# Altium PCB usomiq-bone-cape.PcbDoc (part 2 of 2)
Units mm, origin at the board's own origin, x right, y up, seen from the top; angles counter-clockwise.
Board outline 86.36 x 54.61 mm, 2 copper layers (Top Layer, Bottom Layer); 65 components, 133 nets, 450 pads, 169 vias.
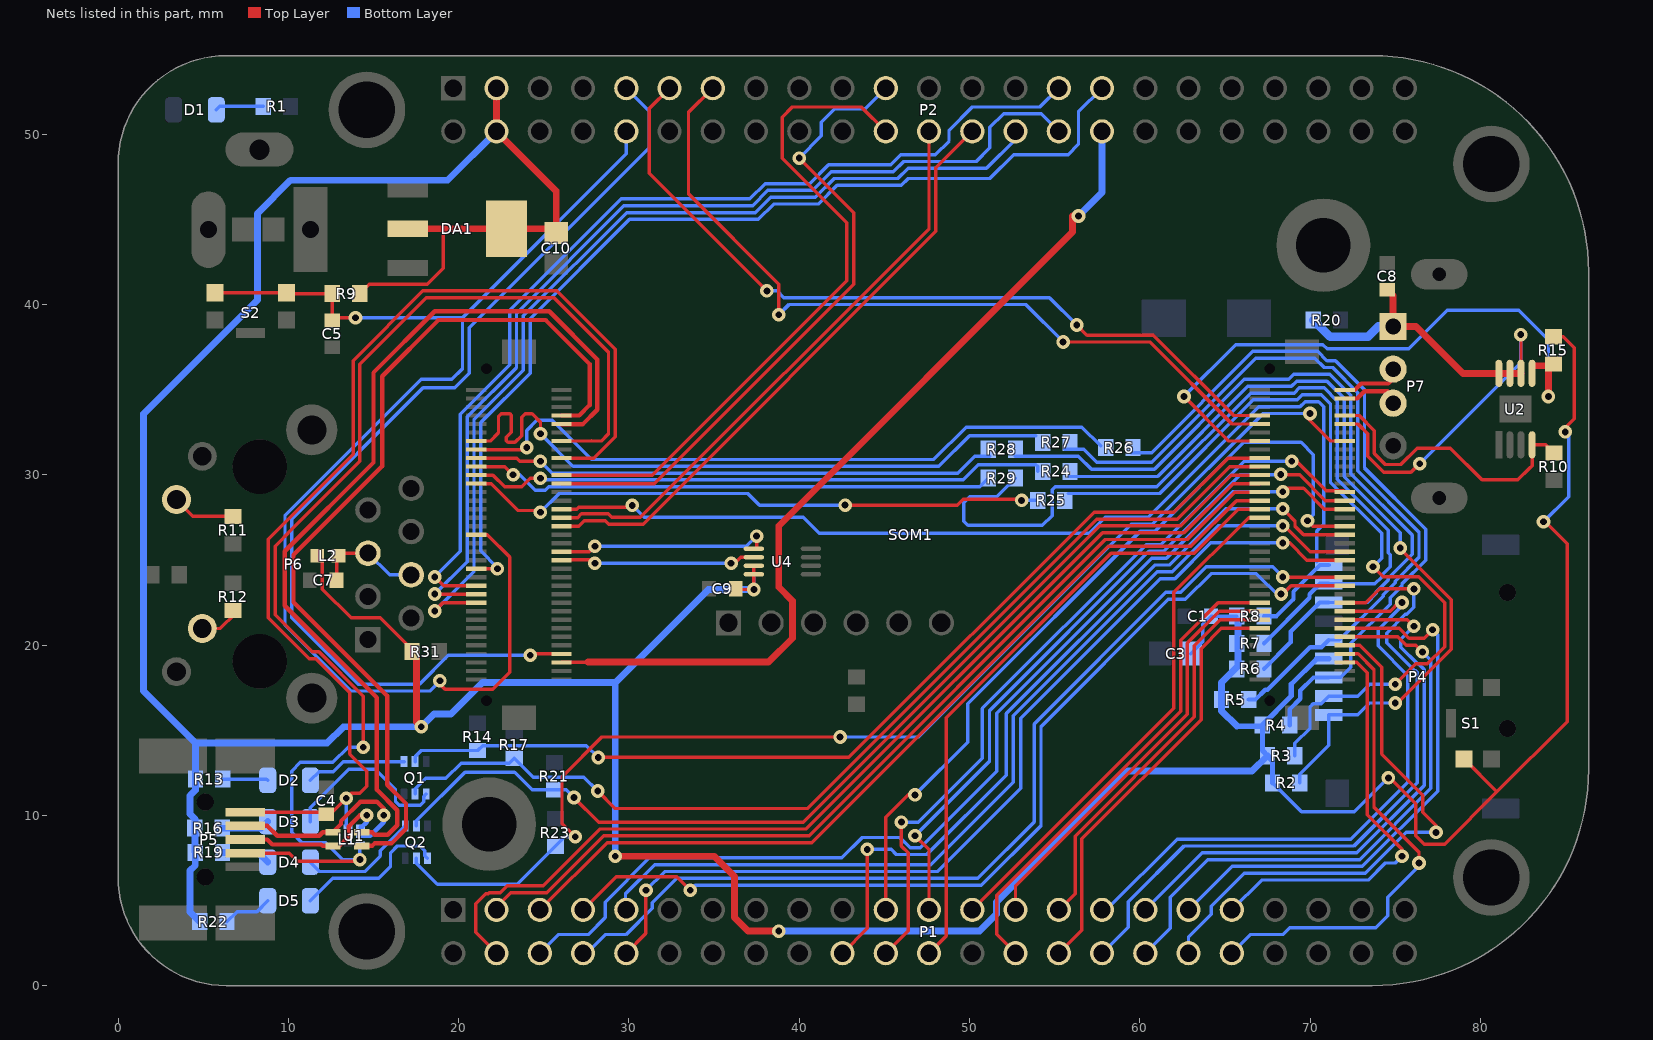
[diagram p2: the nets of this part, all layers, seen from the top]

## Via types
v1: diameter 0.8, hole 0.4, Top Layer to Bottom Layer, 166 vias
v2: diameter 0.6, hole 0.4, Top Layer to Bottom Layer, 2 vias
v3: diameter 1.27, hole 0.711, Top Layer to Bottom Layer, 1 vias

## Nets (pads, with @x,y where several pads share a name; then routed paths per layer and width w, separated by ;. In a path a pad name is that pad's centre, name@x,y a point inside that pad or via, vN(x,y) a via of type N, cw(c..) or ccw(c..) an arc to the next point about the centre after c; other vN are vias at no path point) (continued)
LCD_DATA8: P1.37 SOM1.B5 | length 24.1
  Top Layer w0.2: SOM1.B5@72.039,18.982 72.754,18.982 73.358,18.378 73.358,10.042 v1@75.4,8
  Bottom Layer w0.2: P1.37@65.405,4.445 67.16,6.2 73.41,6.2 74.41,7.2 75,7.2 v1(75.4,7.6)
LCD_DATA9: P1.38 SOM1.B7 | length 28.4
  Top Layer w0.2: SOM1.B7@72.039,19.482 72.82,19.482 73.758,18.544 73.758,10.476 76.4,7.834 v1(76.4,7.2)
  Bottom Layer w0.2: P1.38@65.405,1.905 66.5,3 68.4,3 68.8,3.4 73.85,3.4 74.555,4.105 74.555,5.18 76.2,6.825 v1@76.2,7.2
LCD_DATA10: P1.36 SOM1.B9 | length 32
  Top Layer w0.2: SOM1.B9@72.039,19.982 72.913,19.982 74.2,18.695 74.2,13.6 76.619,11.181 76.619,10.181 77.4,9.4 v1(77.4,9)
  Bottom Layer w0.2: P1.36@62.865,1.905 62.865,2.865 64.2,4.2 64.2,4.668 66.132,6.6 73.244,6.6 75.644,9 v1(77.4,9)
LCD_DATA11: P1.34 SOM1.B11 | length 35
  Top Layer w0.2: SOM1.B11@72.039,20.482 75.162,20.482 75.644,20 76.2,20 v1(76.6,19.6)
  Bottom Layer w0.2: P1.34@60.325,1.905 61.8,3.38 61.8,5.2 64,7.4 72.913,7.4 77.1,11.587 77.1,19.1 v1(76.6,19.6)
LCD_DATA12: P1.35 SOM1.B13 | length 32.7
  Top Layer w0.2: SOM1.B13@72.039,20.982 75.228,20.982 75.81,20.4 76.7,20.4 v1(77.2,20.9)
  Bottom Layer w0.2: P1.35@62.865,4.445 65.42,7 73.079,7 77.5,11.421 77.5,20.6 v1(77.2,20.9)
LCD_DATA13: P1.33 SOM1.B15 | length 33.9
  Top Layer w0.2: SOM1.B15@72.039,21.482 75.718,21.482 v1(76.1,21.1)
  Bottom Layer w0.2: P1.33@60.325,4.445 63.68,7.8 72.747,7.8 76.7,11.753 76.7,18.566 76.366,18.9 76.31,18.9 75.333,19.877 75.333,20.333 v1(76.1,21.1)
LCD_DATA14: P1.31 SOM1.B17 | length 36.5
  Top Layer w0.2: SOM1.B17@72.039,21.982 74.7,21.982 75.218,22.5 v1(75.4,22.5)
  Bottom Layer w0.2: P1.31@57.785,4.445 58.045,4.445 62.2,8.6 72.4,8.6 75.75,11.95 75.75,18.2 74,19.95 74,20.9 75.4,22.3 v1(75.4,22.5)
LCD_DATA15: P1.32 SOM1.B19 | length 40.8
  Top Layer w0.2: SOM1.B19@72.039,22.482 73.282,22.482 74.1,23.3 v1(76.1,23.3)
  Bottom Layer w0.2: P1.32@57.785,1.905 59.315,3.435 59.315,4.915 62.6,8.2 72.582,8.2 76.3,11.918 76.3,18.4 76.2,18.5 76.144,18.5 74.5,20.144 74.5,20.7 75.6,21.8 75.69,21.8 76.1,22.21 v1(76.1,23.3)
LCD_DE: P1.30 SOM1.B14 | length 25.3
  Top Layer w0.2: P1.30@55.245,1.905 56.6,3.26 56.6,8.617 63.6,15.617 63.6,19.79 64.792,20.982 SOM1.B14@67.039,20.982
LCD_HSYNC: P1.29 SOM1.B16 | length 23.3
  Top Layer w0.2: P1.29@55.245,4.445 56.2,5.4 56.2,8.783 63.2,15.783 63.2,19.956 64.726,21.482 SOM1.B16@67.039,21.482
LCD_PCLK: P1.28 SOM1.B20 | length 28.9
  Top Layer w0.2: P1.28@52.705,1.905 51.6,3.01 51.6,5.314 62.4,16.114 62.4,20.287 64.595,22.482 SOM1.B20@67.039,22.482
LCD_VSYNC: P1.27 SOM1.B18 | length 24.9
  Top Layer w0.2: P1.27@52.705,4.445 52.705,5.854 62.8,15.949 62.8,20.121 64.661,21.982 SOM1.B18@67.039,21.982
MMC0_CD: P4.9 R8.1 SOM1.A41 | length 63
  Top Layer w0.2: SOM1.A41@26.039,27.982 26.929,27.982 27.047,28.1 v1@29.864,28.1
  Bottom Layer w0.2: v1(30.2,28.2) 30.9,27.5 40.242,27.5 41.173,26.568 57.031,26.568 57.963,27.5 60.5,27.5 67,34 69.41,34 69.71,34.3 70.5,34.3 70.8,34 70.8,27.1 70.4,26.7 P4.9@70.4,24.9
  Bottom Layer w0.254: R8.1@67.3,21.7 68.028,21.7 69.027,22.699 69.027,23.139 70.588,24.7 P4.9@71.1,24.7
MMC0_CLKO: R27.2 SOM1.A58 | length 39.8
  Top Layer w0.2: SOM1.A58@21.039,31.982 21.866,31.982 22.339,32.455 22.339,33.421 22.5,33.582 23.018,33.582 23.1,33.5 23.1,32.5 22.8,32.2 22.8,32 22.9,31.9 23.31,31.9 23.7,32.29 23.7,33.382 23.9,33.582 24.31,33.582 24.807,33.085 v1(24.807,32.407)
  Bottom Layer w0.2: v1(24.807,32.407) 26.714,30.5 48.2,30.5 50,32.3 R27.2@53.9,32.3
MMC0_CMD: R26.2 SOM1.A56 | length 40.4
  Top Layer w0.2: SOM1.A56@21.039,31.482 23.882,31.482 v1(24,31.6) v1@24,31.8
  Bottom Layer w0.2: v1(24,31.6) 24,32.6 24.6,33.2 25.5,33.2 27.8,30.9 47.9,30.9 49.8,32.8 56.6,32.8 R26.2@57.7,31.7
MMC0_DAT0: R28.2 SOM1.A54 | length 30.9
  Top Layer w0.2: SOM1.A54@21.039,30.982 23.418,30.982 23.6,30.8 v1(24.8,30.8)
  Bottom Layer w0.2: v1(24.8,30.8) 25.5,30.1 49.3,30.1 50.3,31.1 R28.2@51.2,31.1
MMC0_DAT1: R29.2 SOM1.A52 | length 30.9
  Top Layer w0.2: SOM1.A52@21.039,30.482 22.718,30.482 v1(23.2,30)
  Bottom Layer w0.2: v1(23.2,30) 23.6,30 24.5,29.1 25.09,29.1 25.29,29.3 50.6,29.3 R29.2@51.1,29.8
MMC0_DAT2: R24.2 SOM1.A50 | length 34.2
  Top Layer w0.2: SOM1.A50@21.039,29.982 22.018,29.982 22.7,29.3 23.7,29.3 24.2,29.8 v1(24.8,29.8)
  Bottom Layer w0.2: v1(24.8,29.8) 24.9,29.7 49.626,29.7 50.526,30.6 53.9,30.6 54,30.5 R24.2@54,30.2
MMC0_DAT3: R25.2 SOM1.A48 | length 34.6
  Top Layer w0.2: SOM1.A48@21.039,29.482 21.918,29.482 23.5,27.9 24.7,27.9 v1(24.8,27.8) ; v1(42.697,28.219) 49.276,28.219 49.632,28.575 52.984,28.575 v1(53.061,28.499)
  Bottom Layer w0.2: v1(24.8,27.8) 25.9,28.9 36.988,28.9 37.668,28.219 v1(42.697,28.219) ; v1(53.061,28.499) 53.999,28.499 R25.2@54,28.5
MMC1_CLK: P1.21 SOM1.B37 | length 47.6
  Top Layer w0.2: P1.21@45.085,4.445 45.085,9.885 46.4,11.2 v1(46.8,11.2) ; v1(69.85,27.3) 70.168,26.982 SOM1.B37@72.039,26.982
  Bottom Layer w0.2: v1(46.8,11.2) 49.903,14.303 49.903,16.56 60.043,26.7 60.909,26.7 66.109,31.9 69.471,31.9 70.2,31.171 70.2,27.65 v1(69.85,27.3)
MMC1_CMD: P1.20 SOM1.B35 | length 46.3
  Top Layer w0.2: P1.20@42.545,1.905 44,3.36 v1(44,8) ; v1(68.4,28) 68.61,28 68.61,27.79 69.116,27.284 69.116,26.984 69.618,26.482 SOM1.B35@72.039,26.482
  Bottom Layer w0.2: v1(44,8) 45.4,8 45.7,7.7 47.5,7.7 52.151,12.351 52.151,15.98 60.872,24.7 61.737,24.7 65.037,28 v1(68.4,28)
MMC1_DAT0: P1.25 SOM1.B40 | length 30.4
  Top Layer w0.2: P1.25@50.165,4.445 62,16.28 62,23.092 66.39,27.482 SOM1.B40@67.039,27.482
MMC1_DAT1: P1.24 SOM1.B42 | length 37.7
  Top Layer w0.2: P1.24@47.625,1.905 48.635,2.915 48.635,15.725 58.31,25.4 63.2,25.4 65.782,27.982 SOM1.B42@67.039,27.982
MMC1_DAT2: P1.5 SOM1.B44 | length 52.2
  Top Layer w0.2: P1.5@24.765,4.445 28.72,8.4 40.744,8.4 58.144,25.8 63,25.8 65.682,28.482 SOM1.B44@67.039,28.482
MMC1_DAT3: P1.6 SOM1.B41 | length 62
  Top Layer w0.2: v1@68.4,29.2 68.401,29.201 69.618,29.201 70.838,27.982 SOM1.B41@72.039,27.982
  Bottom Layer w0.2: P1.6@24.765,1.905 25.86,3 27.6,3 28.6,4 28.6,4.9 31.2,7.5 42.5,7.5 43.7,8.7 45.91,8.7 46.51,8.1 47.1,8.1 51.6,12.6 51.6,15.994 60.706,25.1 61.572,25.1 65.472,29 v1(68.4,29)
MMC1_DAT4: P1.23 SOM1.B43 | length 41.1
  Top Layer w0.2: v1(46.8,8.8) 47.625,7.975 P1.23@47.625,4.445 ; v1@68.4,30 69.385,30 70.903,28.482 SOM1.B43@72.039,28.482
  Bottom Layer w0.2: v1(46.8,8.8) 51.176,13.176 51.176,16.136 60.54,25.5 61.406,25.5 65.906,30 v1@68.4,30
  other v1: 68.275,30.025
MMC1_DAT5: P1.22 SOM1.B45 | length 45.5
  Top Layer w0.2: P1.22@45.085,1.905 46.4,3.22 46.4,7.8 46,8.2 v1(46,9.6) ; v1@69.261,30.861 69.261,30.752 70.955,29.057 71.964,29.057 SOM1.B45@72.039,28.982
  Bottom Layer w0.2: v1(46,9.6) 47,9.6 50.751,13.351 50.751,16.277 60.375,25.9 61.24,25.9 66.14,30.8 v1@69,30.8
  other v1: 68.925,30.8
MMC1_DAT6: P1.3 SOM1.B46 | length 55.2
  Top Layer w0.2: P1.3@22,4.4 23.055,5.455 25.175,5.455 28.52,8.8 40.579,8.8 57.979,26.2 62.8,26.2 65.582,28.982 SOM1.B46@67.039,28.982
MMC1_DAT7: P1.4 SOM1.B48 | length 59.7
  Top Layer w0.2: P1.4@22.225,1.905 21,3.13 21,4.8 21.6,5.4 21.752,5.4 21.807,5.455 22.455,5.455 22.855,5.855 24.975,5.855 28.32,9.2 40.413,9.2 57.813,26.6 62.6,26.6 65.482,29.482 SOM1.B48@67.039,29.482
NetC7_1: C7.1 L2.2 P6.4 P6.5 | length 6.4
  Top Layer w0.2: C7.1@12.831,23.805 12.831,25.142 13.084,25.395 P6.5@14.675,25.395
  Bottom Layer w0.2: P6.5@14.675,25.395 15.945,24.125 P6.4@17.215,24.125
NetD1_1: D1.1 R1.1 | length 2.8
  Bottom Layer w0.2: D1.1@5.766,51.435 5.969,51.638 R1.1@8.522,51.638
NetD2_1: D2.1 R13.1 | length 2.7
  Bottom Layer w0.2: R13.1@6.144,12.13 8.716,12.13 D2.1@8.789,12.057
NetD2_2: D2.2 Q1.1 | length 6
  Bottom Layer w0.2: D2.2@11.289,12.057 11.802,12.57 12.643,12.57 13.228,13.155 Q1.1@16.794,13.155
NetD3_1: D3.1 R16.1 | length 2.8
  Bottom Layer w0.4: R16.1@6.109,9.246 8.403,9.246 D3.1@8.789,9.632
NetD3_2: D3.2 Q1.4 | length 10.3
  Bottom Layer w0.2: D3.2@11.289,9.632 11.289,10.455 13.534,12.7 15.09,12.7 16.294,11.496 16.294,10.806 16.5,10.6 17.738,10.6 17.944,10.806 17.944,11.105 Q1.4@18.094,11.255
NetD4_1: D4.1 R19.1 | length 2.9
  Bottom Layer w0.4: R19.1@6.134,7.823 8.223,7.823 D4.1@8.789,7.257
NetD4_2: D4.2 Q2.1 | length 7.1
  Bottom Layer w0.2: D4.2@11.289,7.257 11.846,6.7 14.49,6.7 15.4,7.61 15.4,7.911 Q2.1@16.869,9.38
NetD5_1: D5.1 R22.1 | length 2.9
  Bottom Layer w0.2: R22.1@6.394,3.755 6.989,4.35 8.157,4.35 D5.1@8.789,4.982
NetD5_2: D5.2 Q2.4 | length 9.2
  Bottom Layer w0.2: D5.2@11.289,4.982 12.607,6.3 15.3,6.3 16,7 16,7.8 16.4,8.2 17.748,8.2 18.019,7.929 18.019,7.63 Q2.4@18.169,7.48
NetP6_10: P6.10 R12.2 | length 2.3
  Top Layer w0.2: P6.10@4.945,20.975 6,20.975 R12.2@6.875,21.85
NetP6_11: P6.11 R11.2 | length 3.7
  Top Layer w0.2: P6.11@3.425,28.545 4.395,27.575 R11.2@6.756,27.575
PWR_BUT: P2.9 SOM1.A7 | length 59.7
  Top Layer w0.2: v1(24.2,19.4) 24.282,19.482 SOM1.A7@26.039,19.482
  Bottom Layer w0.2: v1(24.2,19.4) 19.4,19.4 17.7,17.7 14.1,17.7 10.2,21.6 10.2,27.4 17.906,35.106 19.78,35.106 20.626,35.952 20.626,38.627 31.2,49.2 31.2,51.36 ; P2.9@29.845,52.705 31.19,51.36
SD_CLK: P4.5 R5.1 R27.1 | length 45.6
  Bottom Layer w0.2: R27.1@55.6,31.5 56.7,31.5 57.467,30.733 60.699,30.733 66.81,36.845 70.284,36.845 70.828,36.3 71.328,36.3 72.8,34.828 72.8,30.228 76.4,26.628 76.4,25.156 75,23.756 75,23.655 74.944,23.6 74.3,22.956 74.3,22.868 71.731,20.3 P4.5@71.1,20.3
  Bottom Layer w0.254: R5.1@66.4,16.8 66.803,16.8 67.374,17.372 67.5,17.372 70.005,19.877 70.677,19.877 P4.5@71.1,20.3
SD_CMD: P4.3 R4.1 R26.1 | length 42.5
  Bottom Layer w0.2: R26.1@59.5,31.3 60.7,31.3 66.644,37.245 70.45,37.245 70.994,36.7 71.494,36.7 73.2,34.994 73.2,30.4 76.8,26.8 76.8,24.99 75.4,23.59 75.4,23.49 75.11,23.2 74.7,22.79 74.7,22.4 72.4,20.1 72.4,18.7 71.8,18.1 P4.3@71.1,18.1
  Bottom Layer w0.254: R4.1@68.8,15.3 68.8,16.222 69.427,16.849 69.427,17.327 70.2,18.1 P4.3@71.1,18.1
SD_D0: P4.7 R6.1 R28.1 | length 45.6
  Bottom Layer w0.2: R28.1@52.7,31.1 56.4,31.1 57.167,30.333 60.865,30.333 66.131,35.6 68.747,35.6 69.047,35.9 71.163,35.9 72.4,34.663 72.4,30.063 76,26.463 76,25.321 74.6,23.921 74.6,23.821 73.9,23.121 73.9,23.034 73.366,22.5 P4.7@71.1,22.5
  Bottom Layer w0.254: R6.1@67.3,18.6 68.873,20.173 68.873,20.801 70.572,22.5 P4.7@71.1,22.5
SD_D1: P4.8 R7.1 R29.1 | length 51.8
  Bottom Layer w0.2: R29.1@52.7,29.8 51.602,28.702 50.013,28.702 49.657,28.346 49.657,27.28 49.911,27.026 54.28,27.026 54.85,27.596 54.85,29.124 55.026,29.3 61.01,29.3 66.51,34.8 69.079,34.8 69.379,35.1 70.831,35.1 71.6,34.331 71.6,29.731 74.6,26.731 74.6,25.41 74.7,25.31 74.7,24.587 74.2,24.087 74.2,23.987 73.813,23.6 P4.8@71.1,23.6
  Bottom Layer w0.254: R7.1@67.3,20.1 69.973,22.773 69.973,22.985 70.588,23.6 P4.8@71.1,23.6
SD_D2: P4.1 R2.1 R24.1 | length 49.8
  Top Layer w0.2: v1(75,16.6) 75.156,16.6 78.3,19.744 78.3,22.656 75.3,25.655 v1(75.3,25.7)
  Bottom Layer w0.2: R24.1@55.8,29.9 61.044,29.9 66.344,35.2 68.913,35.2 69.213,35.5 70.997,35.5 72,34.497 72,29.897 75.3,26.597 v1(75.3,25.7) ; R2.1@69.4,11.9 69.4,12.426 71.1,14.126 P4.1@71.1,15.9 72.8,15.9 73.5,16.6 v1(75,16.6)
SD_D3: P4.2 R3.1 R25.1 | length 49.3
  Top Layer w0.2: v1(73.7,24.6) 74.3,24 76.39,24 77.9,22.49 77.9,19.91 76.89,18.9 76.2,18.9 v1(75,17.7)
  Bottom Layer w0.2: R25.1@55.8,28.9 61.175,28.9 66.675,34.4 69.244,34.4 69.544,34.7 70.666,34.7 71.2,34.166 71.2,29.566 74.2,26.566 74.2,25.1 v1(73.7,24.6) ; R3.1@69.1,13.5 69.1,14.226 70,15.126 70,16.374 70.176,16.55 70.65,16.55 P4.2@71.1,17 72.8,17 73.5,17.7 v1(75,17.7)
SPI1_CS0: P2.28 SOM1.A20 | length 55.3
  Top Layer w0.2: v1(18.6,22) 19.082,22.482 SOM1.A20@21.039,22.482
  Bottom Layer w0.2: v1(18.6,22) 20.9,24.3 20.9,33.235 23.8,36.135 23.8,39.331 29.869,45.4 37.43,45.4 38.33,46.3 40.953,46.3 42.053,47.4 45.8,47.4 46.4,48 51,48 P2.28@52.705,49.705
SPI1_D0: P2.29 SOM1.A24 | length 58.2
  Top Layer w0.2: v1(18.6,24) 19.118,23.482 SOM1.A24@21.039,23.482
  Bottom Layer w0.2: v1(18.6,24) 20.1,25.5 20.1,33.566 23,36.466 23,39.663 29.537,46.2 37.099,46.2 37.999,47.1 40.621,47.1 41.721,48.2 45.366,48.2 45.966,48.8 48,48.8 48.8,49.6 48.8,50.228 50.172,51.6 54.14,51.6 P2.29@55.245,52.705
SPI1_D1: P2.30 SOM1.A22 | length 58.8
  Top Layer w0.2: v1(18.6,23) 18.618,22.982 SOM1.A22@21.039,22.982
  Bottom Layer w0.2: v1(18.6,23) 20.5,24.9 20.5,33.4 23.4,36.3 23.4,39.497 29.703,45.8 37.264,45.8 38.164,46.7 40.787,46.7 41.887,47.8 45.531,47.8 46.131,48.4 50.4,48.4 51.2,49.2 51.2,50.4 52,51.2 54.21,51.2 P2.30@55.245,50.165
SPI1_SCLK: P2.31 SOM1.A28 | length 57.8
  Top Layer w0.2: SOM1.A28@21.039,24.482 21.043,24.486 v1(22.276,24.486)
  Bottom Layer w0.2: v1(22.276,24.486) 22.276,24.551 21.3,25.527 21.3,33.069 24.2,35.969 24.2,39.166 30.034,45 37.596,45 38.496,45.9 41.118,45.9 42.218,47 46,47 46.4,47.4 51.2,47.4 52.6,48.8 55.8,48.8 56.4,49.4 56.4,51.32 P2.31@57.785,52.705
SYS_RESETN: C5.1 P2.10 R9.1 S2.2 S2.4 SOM1.A36 | length 79.6
  Top Layer w0.2: S2.4@5.681,40.691 S2.2@9.881,40.691 9.931,40.64 R9.1@12.586,40.64 12.573,40.627 C5.1@12.573,39.065 12.725,39.218 v1(13.945,39.218) ; v1(18.9,17.9) 18.9,17.7 19.2,17.4 22,17.4 23,18.4 23,25.17 21.688,26.482 SOM1.A36@21.039,26.482
  Bottom Layer w0.2: v1(13.945,39.218) 13.954,39.227 20.227,39.227 ; v1(18.9,17.9) 18.3,17.3 13.7,17.3 9.8,21.2 9.8,27.6 17.8,35.6 19.59,35.6 20.227,36.237 20.227,39.227 ; P2.10@29.845,50.165 29.845,48.845 20.227,39.227
TIMER4: P1.7 SOM1.B23 | length 58.6
  Top Layer w0.2: P1.7@27.305,4.445 29.26,6.4 32.8,6.4 v1(33.6,5.6) ; v1@68.239,22.839 68.882,23.482 SOM1.B23@72.039,23.482
  Bottom Layer w0.2: v1(33.6,5.6) 33.9,5.9 50.7,5.9 54.2,9.4 54.2,15.2 61.682,22.682 62.682,22.682 64.2,24.2 66.839,24.2 68.239,22.8 68.3,22.861 68.3,23.293 v1(68.3,23)
TIMER5: P1.9 SOM1.B31 | length 55.1
  Top Layer w0.2: v1@68.575,26.925 70.018,25.482 SOM1.B31@72.039,25.482
  Bottom Layer w0.2: P1.9@29.8,4.2 29.8,5.39 31.51,7.1 47.734,7.1 52.576,11.941 52.576,15.838 61.037,24.3 61.903,24.3 64.603,27 v1(68.4,27)
TIMER6: P1.10 SOM1.B29 | length 56.5
  Top Layer w0.2: P1.10@29.845,1.905 31,3.06 v1(31,5.6) ; v1(68.4,26) 68.8,26 69.818,24.982 SOM1.B29@72.039,24.982
  Bottom Layer w0.2: v1(31,5.6) 32.1,6.7 48.1,6.7 53,11.6 53,15.697 61.203,23.9 62.069,23.9 64.169,26 v1(68.4,26)
TIMER7: P1.8 SOM1.B25 | length 57.6
  Top Layer w0.2: v1(68.4,24) 68.418,23.982 SOM1.B25@72.039,23.982
  Bottom Layer w0.2: P1.8@27.6,2 28.6,3 29.828,3 31.375,4.547 31.375,4.863 32.812,6.3 50.49,6.3 53.8,9.61 53.8,15.366 61.534,23.1 62.4,23.1 63.9,24.6 67.8,24.6 v1(68.4,24)
UART0_RX: SOM1.A29 U4.6 | length 11.4
  Top Layer w0.2: SOM1.A29@26.2,25 27.8,25 v1(28,24.8) ; v1(36,24.8) 36.2,24.8 36.557,25.157 U4.6@37.339,25.157
  Bottom Layer w0.2: v1(28,24.8) v1(36,24.8)
UART0_TX: SOM1.A31 U4.5 | length 12.5
  Top Layer w0.2: SOM1.A31@26.039,25.482 27.682,25.482 v1(28,25.8) ; U4.5@37.5,25.7 v1(37.5,26.4)
  Bottom Layer w0.2: v1(28,25.8) 36.9,25.8 v1(37.5,26.4)
UART1_RXD: P2.26 SOM1.A37 | length 36.1
  Top Layer w0.2: SOM1.A37@26.039,26.982 27.061,26.982 27.379,27.3 28.621,27.3 28.821,27.1 30.831,27.1 48.025,44.294 48.025,48.025 P2.26@50.165,50.165
UART1_TXD: P2.24 SOM1.A39 | length 34.5
  Top Layer w0.2: SOM1.A39@26.039,27.482 26.995,27.482 27.213,27.7 28.787,27.7 28.987,27.5 30.666,27.5 47.625,44.459 P2.24@47.625,50.165
UART2_RXD: P2.22 SOM1.A49 | length 39.6
  Top Layer w0.2: SOM1.A49@26.039,29.982 31.382,29.982 42.8,41.4 42.8,44.8 39,48.6 39,49.742 38.995,49.747 38.995,50.995 39.6,51.6 43.65,51.6 P2.22@45.085,50.165
UART2_TXD: P2.21 SOM1.A47 | length 37.6
  Top Layer w0.2: SOM1.A47@26.039,29.482 31.482,29.482 43.2,41.2 43.2,45.4 40.3,48.3
  Bottom Layer w0.2: v1(40,48.6) 41.3,49.9 41.3,50.7 42.1,51.5 43.88,51.5 P2.21@45.085,52.705
UART4_RXD: P2.11 SOM1.B64 | length 47
  Top Layer w0.2: P2.11@32.385,52.705 31.191,51.511 31.191,47.709 v1@37.95,40.95 ; v1(56.3,38.8) 56.9,38.2 60.8,38.2 65.518,33.482 SOM1.B64@67.039,33.482
  Bottom Layer w0.2: v1(38.1,40.8) 38.7,40.8 39.1,40.4 54.7,40.4 v1(56.3,38.8)
UART4_TXD: P2.13 SOM1.B62 | length 47.5
  Top Layer w0.2: P2.13@34.925,52.705 33.5,51.28 33.5,46.5 38.8,41.2 v1(38.8,39.4) ; v1(55.5,37.8) 60.6,37.8 65.418,32.982 SOM1.B62@67.039,32.982
  Bottom Layer w0.2: v1(38.8,39.4) 39.4,40 53.3,40 v1(55.5,37.8)
USB0_D_N: L1.4 P5.2 U1.2 | length 12
  Top Layer w0.254: P5.2@7.469,9.381 8.763,9.381 9.344,8.8 11.815,8.8 12.02,9.005 L1.4@12.619,9.005 12.619,9.019 13.088,9.488 13.088,9.66 14.228,10.8 15.2,10.8 15.6,10.4 v1(15.6,10)
  Bottom Layer w0.254: U1.2@14.239,8.807 14.807,8.807 15.6,9.6 v1(15.6,10)
USB0_D_P: L1.1 P5.3 U1.1 | length 9.3
  Top Layer w0.254: P5.3@7.469,8.581 8.763,8.581 9.052,8.292 11.933,8.292 12.02,8.205 L1.1@12.619,8.205 13.005,8.205 13.542,8.742 13.542,9.34 14.202,10 v1(14.6,10)
  Bottom Layer w0.254: U1.1@14.239,9.307 14.307,9.307 14.6,9.6 v1(14.6,10)
USB0_ID: P5.4 SOM1.A57 U1.3 | length 73.5
  Top Layer w0.2: P5.4@7.469,7.781 10.05,7.781 10.516,7.315 14.115,7.315 v1(14.2,7.4) ; 9.807,26.393 10.207,26.792 ; v1(14.4,14) 14.4,17 11.8,19.6 11.4,19.6 9.225,21.775 9.225,25.81 10.207,26.792 ; SOM1.A57@26.039,31.982 27.782,31.982 ; 27.8,32 27.782,31.982 ; 10.207,26.792 14.2,30.785 14.2,36.5 18.1,40.4 25.6,40.4 28.8,37.2 28.8,32.41 28.372,31.982 27.782,31.982
  Bottom Layer w0.2: v1(14.2,7.4) 13.2,7.4 12.2,8.4 10.8,8.4 10.2,9 10.2,12.6 10.707,13.107 12.614,13.107 13.507,14 v1(14.4,14) ; v1@14.2,7.6 14.2,8.268 U1.3@14.239,8.307
USB0_N: L1.3 SOM1.A61 | length 55.1
  Top Layer w0.254: L1.3@14.319,9.005 14.918,9.005 15.063,8.86 15.842,8.86 16.4,9.418 16.4,10.3 15.2,11.5 15.2,16.9 9.792,22.308 9.792,25.51 15,30.718 15,36 18.6,39.6 25.318,39.6 28.146,36.772 28.146,33.822 27.298,32.974 SOM1.A61@26.039,32.974
USB0_P: L1.2 SOM1.A63 | length 53.4
  Top Layer w0.254: L1.2@14.319,8.205 14.918,8.205 15.065,8.352 16.052,8.352 16.908,9.208 16.908,10.692 15.8,11.8 15.8,17.018 10.3,22.518 10.3,25.3 15.508,30.508 15.508,35.79 18.81,39.092 25.108,39.092 27.692,36.508 27.692,34.092 27.082,33.482 SOM1.A63@26.039,33.482
USB0_VBUS: C4.1 P5.1 SOM1.A53 U1.6 | length 66.6
  Top Layer w0.2: P5.1@7.469,10.181 12.106,10.181 C4.1@12.219,10.068 12.468,10.068 v1(13.4,11) 13.7,11.3 14.2,11.3 14.6,11.7 14.6,12.6 13.6,13.6 13.6,17.206 11.606,19.2 11.234,19.2 8.825,21.609 8.825,26.225 9.561,26.961 13.8,31.2 13.8,36.7 17.9,40.8 25.766,40.8 29.2,37.366 29.2,32.244 27.938,30.982 SOM1.A53@26.039,30.982
  Bottom Layer w0.2: v1(13.4,11) 13.4,9.406 U1.6@13.499,9.307
USB1_DRVVBUS: R10.2 SOM1.B63 U2.4 | length 17.2
  Top Layer w0.2: SOM1.B63@72.039,33.482 72.884,33.482 73.779,32.587 73.779,31.249 74.423,30.605 75.335,30.605 76.29,31.56 78.24,31.56 80.1,29.7 82.207,29.7 82.889,30.382 82.889,30.389 83.039,30.539 U2.4@83.039,31.757 83.839,31.757 R10.2@84.314,31.282
USB1_N: P7.2 SOM1.B69 | length 3.7
  Top Layer w0.254: SOM1.B69@72.039,34.982 72.629,34.982 73.004,35.357 74.6,35.357 74.879,35.636 P7.2@74.879,36.205
USB1_OCN: R15.1 SOM1.B58 U2.5 | length 35.9
  Top Layer w0.2: v1(62.6,34.6) 65.218,31.982 SOM1.B58@67.039,31.982
  Top Layer w0.4: U2.5@83.1,36.4 R15.1@84.289,36.4 ; v1(84,34.6) 84,36.018
  Bottom Layer w0.2: v1(62.6,34.6) 65.644,37.644 70.755,37.644 71,37.4 75.8,37.4 78.07,39.67 82.25,39.67 84,37.92 v1(84,34.6)
USB1_P: P7.3 SOM1.B67 | length 3.5
  Top Layer w0.254: SOM1.B67@72.039,34.482 72.771,34.482 73.192,34.903 74.546,34.903 74.879,34.57 P7.3@74.879,34.205
USB1_VBUS: C8.2 P7.1 R20.1 SOM1.B61 U2.6 U2.7 U2.8 | length 35.2
  Top Layer w0.2: SOM1.B61@72.039,32.982 72.818,32.982 73.379,32.421 73.379,31.084 74.323,30.14 75.93,30.14 v1(76.44,30.65) ; v1(82.38,38.23) 82.389,38.221 U2.6@82.389,35.957
  Top Layer w0.4: C8.2@74.539,40.87 74.879,40.53 P7.1@74.879,38.705 76.23,38.705 78.978,35.957 U2.8@81.089,35.957 U2.7@81.739,35.957 U2.6@82.389,35.957
  Bottom Layer w0.2: v1(76.44,30.65) 82.38,36.59 v1(82.38,38.23)
  Bottom Layer w0.508: R20.1@70.189,39.082 70.197,39.082 71.179,38.1 73.4,38.1 74.005,38.705 P7.1@74.879,38.705
USR0: Q2.5 R23.2 SOM1.B57 | length 70.6
  Top Layer w0.2: v1(26.848,8.738) 26.072,9.514 26.072,12.262 28.41,14.6 v1(42.4,14.6) ; v1@69.9,33.3 71.218,31.982 SOM1.B57@72.039,31.982
  Bottom Layer w0.2: Q2.5@17.519,7.48 17.519,7.181 18.756,5.944 23.431,5.944 R23.2@25.679,8.192 26.225,8.738 v1(26.848,8.738) ; v1(42.4,14.6) 47,14.6 59.5,27.1 60.743,27.1 67.243,33.6 v1(70,33.6)
USR1: Q2.2 R21.2 SOM1.B50 | length 60.7
  Top Layer w0.2: v1(26.772,11.049) 28.221,9.6 40.247,9.6 57.647,27 62.4,27 65.382,29.982 SOM1.B50@67.039,29.982
  Bottom Layer w0.2: Q2.2@17.519,9.38 17.519,9.679 20.372,12.532 23.282,12.532 24.32,11.494 R21.2@25.629,11.494 26.327,11.494 v1(26.772,11.049)
USR2: Q1.5 R17.2 SOM1.B52 | length 60.2
  Top Layer w0.2: v1(28.169,11.43) 29.199,10.4 31.039,10.4 40.482,10.4 57.482,27.4 62.2,27.4 65.282,30.482 SOM1.B52@67.039,30.482
  Bottom Layer w0.2: Q1.5@17.444,11.255 17.444,11.554 18.056,12.167 19.253,12.167 20.144,13.057 22.976,13.057 R17.2@23.266,13.348 24.371,12.244 27.355,12.244 v1(28.169,11.43)
USR3: Q1.2 R14.2 SOM1.B54 | length 57.7
  Top Layer w0.2: v1(28.2,13.4) 42.916,13.4 57.316,27.8 62,27.8 65.182,30.982 SOM1.B54@67.039,30.982
  Bottom Layer w0.2: Q1.2@17.444,13.155 17.444,13.454 17.797,13.807 R14.2@21.114,13.807 21.405,14.098 27.502,14.098 v1(28.2,13.4)
VCC_IO: C1.1 C3.2 C9.2 C10.2 DA1.2 DA1.4 L2.1 P2.3 P2.4 P4.4 R2.2 R3.2 R4.2 R5.2 R6.2 R7.2 R8.2 R9.2 R13.2 R15.2 R16.2 R19.2 R22.2 R31.1 S1.1 U4.7 U4.8 | length 272.9
  Top Layer w0.2: L2.1@11.694,25.255 12,24.949 12,23.283 13.683,21.6 15.4,21.6 R31.1@17.518,19.482 ; R9.2@14.186,40.64 14.746,41.2 18.163,41.2 19.101,42.138 19.101,44.45 ; v1@17.518,15.482 v1(17.8,15.2) ; C9.2@36.271,23.317 36.327,23.261 v1(37.339,23.261) U4.8@37.339,24.157 U4.7@37.339,24.657 ; v1@74.674,12.2 76.2,10.674 76.2,8.8 76.7,8.3 77.9,8.3 80.975,11.375 ; S1.1@79.045,13.31 80.975,11.379 80.975,11.375 ; v1@83.7,27.349 85.1,25.949 85.1,15.5 80.975,11.375 ; R15.2@84.289,38.107 84.872,38.107 85.514,37.465 85.514,33.294 v1@84.95,32.73
  Top Layer w0.4: DA1.2@17.014,44.45 19.101,44.45 DA1.4@22.814,44.45 25.487,44.45 C10.2@25.73,44.207 ; v1@17.518,15.482 R31.1@17.518,19.482 ; P2.3@22.225,52.705 P2.4@22.225,50.165 25.73,46.66 C10.2@25.73,44.207 ; C10.2@25.846,44.207 C10.2@25.73,44.207 ; v1(29.2,7.6) 35,7.6 36.2,6.4 36.2,4 37,3.2 v1(38.8,3.2)
  Bottom Layer w0.2: v1(37.339,23.261) 37.339,24.119 ; C3.2@63,19.5 63.7,20.2 63.7,21.213 C1.1@64.187,21.7 R8.2@65.7,21.7 ; R4.2@67.133,15.233 R4.2@67.2,15.3 ; R2.2@67.8,11.9 69.5,10.2 72.6,10.2 v1(74.6,12.2) ; v1(83.71,27.24) 85.19,28.72 v1@85.19,32.52
  Bottom Layer w0.305: 65.7,15.233 R4.2@67.133,15.233 ; R2.2@67.8,11.9 67.8,13.2 R3.2@67.5,13.5 67.2,13.8 R4.2@67.2,15.3 68.9,17 68.9,17.7 70.4,19.2 P4.4@71.1,19.2
  Bottom Layer w0.4: R22.2@4.794,3.755 4.219,4.33 4.219,6.754 4.534,7.069 R19.2@4.534,7.823 4.509,7.849 R16.2@4.509,9.246 4.509,9.794 4.219,10.083 4.219,11.154 4.544,11.479 R13.2@4.544,12.13 4.544,14.256 ; v1@17.6,15.2 13.226,15.2 12.282,14.256 4.544,14.256 ; v1(17.8,15.2) 18.55,15.95 19.55,15.95 21.4,17.8 29.2,17.8 ; P2.4@22.225,50.165 19.359,47.299 10.137,47.299 8.179,45.341 8.179,40.259 1.5,33.58 1.5,17.3 4.544,14.256 ; v1(29.2,7.6) 29.2,17.8 ; v1(37.339,23.261) 34.661,23.261 29.2,17.8 ; v1(38.8,3.2) 50.6,3.2 51.595,4.195 51.595,4.905 59.29,12.6 66.6,12.6 R3.2@67.5,13.5 ; 65.7,15.233 64.8,16.133 64.8,17.8 65.769,18.769 65.769,21.33 R8.2@65.844,21.405
  other v1: 84.99,32.52
VDD_1V8: P2.32 SOM1.A5 | length 52.3
  Top Layer w0.2: SOM1.A5@26.039,18.982 26.057,19 27.6,19
  Top Layer w0.4: 27.6,19 38.2,19 39.6,20.4 39.6,22.6 38.8,23.4 38.8,27 56.059,44.259 56.059,45.2 v1(56.4,45.2)
  Bottom Layer w0.4: v1(56.4,45.2) 57.785,46.585 P2.32@57.785,50.165
pads on no net: J1.2 J1.3 J1.6 P3.3 P4.free P5.SYSPAD10 P5.SYSPAD11 P6.0 P6.7 S1.2 S1.3 S1.5 S2.5 SOM1.A10 SOM1.A12 SOM1.A14 SOM1.A18 SOM1.A25 SOM1.A30 SOM1.A32 SOM1.A34 SOM1.A40 SOM1.A44 SOM1.A46 SOM1.A55 SOM1.B24 SOM1.B26 SOM1.B28 SOM1.B30 SOM1.B32 SOM1.B33 SOM1.B34 SOM1.B36 SOM1.B38 SOM1.B55 SOM1.B56 SOM1.B60 SOM1.B66 SOM1.B68 SOM1.B70 SOM1.GND@23.539,15.732 SOM1.GND@23.539,37.232 SOM1.GND@69.539,15.732 SOM1.GND@69.539,37.232 SOM1.NC U1.5

## Polygon pours and split planes (outlines as drawn)
DGND on Top Layer "TOP-No Net" (solid, pour order 18): 80.01,35.56 76.429,35.56 76.073,35.204 76.073,32.563 76.352,32.283 76.378,32.258 78.816,32.258 79.172,32.258 80.213,33.299 80.162,33.35 80.162,35.179
EARTH on Top Layer "Cover" (solid, pour order 19): 82.72,50.75 83.16,50.31 83.16,50.14 79.37,46.35 79.15,46.35 79.09,46.35 78.62,46.82 82.57,50.77 82.72,50.77
EARTH on Top Layer "Cover" (solid, pour order 14): 13.5,33.6 12.5,34.6 0.3,34.6 0.3,12.4 9.8,12.4 12.9,15.5 12.9,17.7 12.5,18.1 12.116,18.72 11.201,18.872 9.728,18.339 8.458,17.272 6.045,17.247 2.896,17.247 2.9,21.3 2.9,26.2 2.921,32.182 7.747,32.207 10.414,32.106 12.497,32.055 13.5,32.1
EARTH on Top Layer "Cover" (solid, pour order 17): 78.86,46.64 78.856,46.644 ccw(c80.652,48.44) 80.652,45.9 82.848,45.9 cw(c82.848,43.36) 84.644,45.156 85.5,44.3 cw(c84.776,43.576) 85.8,43.576 85.8,12.28 cw(c81.02,12.28) 84.4,8.9 cw(c84.159,9.141) 84.159,8.8 79.9,8.8 ccw(c79.9,7.593) 79.046,8.446 78.5,7.9 ccw(c79.466,6.934) 78.1,6.934 78.1,3.231 cw(c75.369,3.231) 77.3,1.3 77.136,1.136 cw(c75.6,2.673) 75.6,0.5 18.707,0.5 cw(c18.707,2.207) 17.5,1 cw(c18.224,1.724) 17.2,1.724 17.2,3.6 ccw(c15.269,3.6) 16.634,4.966 16,5.6 ccw(c15.517,5.117) 15.517,5.8 14.107,5.8 ccw(c14.107,4.093) 12.9,5.3 12.595,4.995 ccw(c13.79,3.8) 12.1,3.8 12.1,2.9 2.724,2.9 cw(c2.724,3.924) 2,3.2 1.873,3.327 cw(c4.946,6.4) 0.6,6.4 0.6,48.579 cw(c5.721,48.579) 2.1,52.2 cw(c6.204,48.096) 6.204,53.9 10.634,53.9 cw(c10.634,52.534) 11.6,53.5 cw(c11.359,53.259) 11.7,53.259 11.7,51.1 ccw(c14.114,51.1) 12.407,49.393 12.8,49 ccw(c14.007,50.207) 14.007,48.5 15.1,48.5 ccw(c15.1,50.431) 16.466,49.066 16.8,49.4 ccw(c15.351,50.849) 17.4,50.849 17.4,52.876 cw(c18.424,52.876) 17.7,53.6 cw(c18.666,52.634) 18.666,54 75.827,54 cw(c75.827,50.927) 78,53.1 cw(c77.276,52.376) 78.3,52.376 78.3,47.949 ccw(c80.349,47.949) 78.9,46.5 82.659,50.259 cw(c83,49.917) 83,50.4 83.07,50.43 82.506,50.994 ccw(c73.8,42.288) 73.8,54.6 6,54.6 ccw(c6,49.047) 2.074,52.974 1.768,52.668 ccw(c6.036,48.4) 0,48.4 0,6.67 ccw(c7.17,6.67) 2.1,1.6 ccw(c5.963,5.463) 5.963,0 73.809,0 ccw(c73.809,12.291) 82.5,3.6 82.835,3.935 ccw(c74.47,12.3) 86.3,12.3 86.3,42.533 ccw(c75.033,42.533) 83,50.5
DGND on Top Layer "Cover" (solid, remove dead copper, pour order 15): 85.6,54 85.6,0.8 84,0.8 0.8,0.8 0.8,9.2 0.8,54 2.4,54
EARTH on Bottom Layer "Cover" (solid, pour order 21): 83.174,50.326 82.883,50.617 82.883,50.623 82.564,50.623 78.686,46.745 78.975,46.456 79.065,46.456 79.304,46.456 83.174,50.326
EARTH on Bottom Layer "Cover" (solid, pour order 20): 78.86,46.64 78.856,46.644 ccw(c80.652,48.44) 80.652,45.9 82.848,45.9 cw(c82.848,43.36) 84.644,45.156 85.5,44.3 cw(c84.776,43.576) 85.8,43.576 85.8,12.28 cw(c81.02,12.28) 84.4,8.9 cw(c84.159,9.141) 84.159,8.8 79.9,8.8 ccw(c79.9,7.593) 79.046,8.446 78.5,7.9 ccw(c79.466,6.934) 78.1,6.934 78.1,3.231 cw(c75.369,3.231) 77.3,1.3 77.136,1.136 cw(c75.6,2.673) 75.6,0.5 18.707,0.5 cw(c18.707,2.207) 17.5,1 cw(c18.224,1.724) 17.2,1.724 17.2,3.6 ccw(c15.269,3.6) 16.634,4.966 16,5.6 ccw(c15.517,5.117) 15.517,5.8 14.107,5.8 ccw(c14.107,4.093) 12.9,5.3 12.595,4.995 ccw(c13.79,3.8) 12.1,3.8 12.1,2.34 2.724,2.34 2.724,2.9 cw(c2.724,3.924) 2,3.2 1.873,3.327 cw(c4.946,6.4) 0.6,6.4 0.6,48.579 cw(c5.721,48.579) 2.1,52.2 cw(c6.204,48.096) 6.204,53.9 10.634,53.9 cw(c10.634,52.534) 11.6,53.5 cw(c11.359,53.259) 11.7,53.259 11.7,51.1 ccw(c14.114,51.1) 12.407,49.393 12.8,49 ccw(c14.007,50.207) 14.007,48.5 15.1,48.5 ccw(c15.1,50.431) 16.466,49.066 16.8,49.4 ccw(c15.351,50.849) 17.4,50.849 17.4,52.876 cw(c18.424,52.876) 17.7,53.6 cw(c18.666,52.634) 18.666,54 75.827,54 cw(c75.827,50.927) 78,53.1 cw(c77.276,52.376) 78.3,52.376 78.3,47.949 ccw(c80.349,47.949) 78.9,46.5 82.659,50.259 cw(c83,49.917) 83,50.4 83.07,50.43 82.506,50.994 ccw(c73.8,42.288) 73.8,54.6 6,54.6 ccw(c6,49.047) 2.074,52.974 1.768,52.668 ccw(c6.036,48.4) 0,48.4 0,6.67 ccw(c7.17,6.67) 2.1,1.6 ccw(c5.963,5.463) 5.963,0 73.809,0 ccw(c73.809,12.291) 82.5,3.6 82.835,3.935 ccw(c74.47,12.3) 86.3,12.3 86.3,42.533 ccw(c75.033,42.533) 83,50.5
DGND on Bottom Layer "Cover" (solid, remove dead copper, pour order 16): 85.6,54 85.6,0.8 0.8,0.8 0.8,6.4 0.8,54

## Other copper
Top Layer:
  rectangle net 5VDC: 30.8,41.6 32.5,43.7
  pour cut-out: 70.485,50.165 70.7,50.38 70.7,52.6 70.595,52.705 24.765,52.705 24.765,51.633 32.494,43.904 32.494,38.915 34.32,37.089 34.32,35.775 34.09,35.545 34.09,33.922 38.049,33.922 51.927,47.8 67.2,47.8 69.3,49.9 70.6,49.9
  pour cut-out: 71.7,23.482 71.7,17.8 70.186,17.8 67.4,20.586 67.4,22.9 67.7,22.9 68.4,23.6
  pour cut-out: 70.5,39.4 71.6,38.3 71.6,36.8 70.1,35.3 63.7,35.3 60.6,38.4 60.6,39.4
  pour cut-out: 75.565,1.905 75.6,1.94 75.6,6.6 71.239,10.961 71.239,16.181 67.938,19.482 67.156,18.7 66.2,18.7 66.2,16.2 69.4,13 69.4,1.2 69.73,0.87 75.591,0.87
  pour cut-out: 21.639,16.732 19.332,16.732 17.8,15.2 17.7,15.3 15.6,15.3 13.7,17.2 13.7,20 15.094,21.394 15.606,21.394 17.4,19.6 21.5,19.6
Bottom Layer:
  rectangle net 5VDC: 30.8,41.9 32.5,43.5
  pour cut-out: 42.545,52.705 70.485,52.705 70.485,50.085 64.5,44.1 59.4,44.1 59.2,43.9 59.2,39.9 56.6,37.3 56,37.3 53.3,40 39.1,40 38,41.1 38,46.6 40.005,48.605 40.005,50.165

## Silkscreen, mask and mechanical layers (free items; w line width, h text height)
Top Overlay:
  text "1" at 17.325,52.05 h1.52
  text "SysReset" at 2.311,35.662 h1.52
  text "MicroSD card" at 84.099,11.913 h2.5 r90
  text "uSomIQ System on Module" at 26.467,10.795 h4
  text "BootSelect" at 77.394,9.55 h1.52 r90
  text "1" at 17.325,3.625 h1.52
Bottom Overlay:
  text "PWR" at 8.814,52.553 h1.52
  text "uSomIQ Bone Cape v2" at 61.6,46 h2
  text "MENTOREL.com" at 58.1,43 h2
  text "5VDC" at 13.487,39.954 h3.5 r270
  text "1" at 33.6,20.5 h1.52
  text "UART0" at 45.6,17.9 h1.52
Mechanical 1:
  lines w0.254: 0,6.35 ccw(c6.35,6.35) 6.35,0 73.66,0 ccw(c73.66,12.7) 86.36,12.7 86.36,40.64 86.36,41.91 ccw(c73.66,41.91) 73.66,54.61 6.35,54.61 ccw(c6.35,48.26) 0,48.26 0,46.99 0,6.35
Drill Drawing:
  text ".LEGEND" at 133.833,131.572 h1.52
  text "Drill Drawing." at 133.833,129.032 h1.52

## Text inside footprints (layer, text, board x,y; h text height)
D1: Bottom Overlay "A" at 7.544,50.8 h1.2
D2: Bottom Overlay "A" at 7.011,12.692 h1.2 r180
D3: Bottom Overlay "A" at 7.011,10.267 h1.2 r180
D4: Bottom Overlay "A" at 7.011,7.892 h1.2 r180
D5: Bottom Overlay "A" at 7.011,5.617 h1.2 r180
P1: Bottom Overlay "46" at 78.3,3 h1 r90; Bottom Overlay "45" at 78.232,5.461 h1 r90; Bottom Overlay "2" at 17.9,1.8 h1 r90; Bottom Overlay "1" at 17.907,4.826 h1 r90
P2: Bottom Overlay "46" at 78.232,50.673 h1 r90; Bottom Overlay "45" at 78.232,53.721 h1 r90; Bottom Overlay "2" at 18,50.3 h1 r90; Bottom Overlay "1" at 18,53.2 h1 r90